# Altium PCB JacdacAccessSwitchInput 34.PcbDoc
Units mm, origin at the board's own origin, x right, y up, seen from the top; angles counter-clockwise.
Board outline 16.5 x 32.9 mm, 2 copper layers (Top Layer, Bottom Layer), stack 1.525 mm thick; 22 components, 19 nets, 81 pads, 17 vias.
Unrouted connection lines stored in the file: 14.
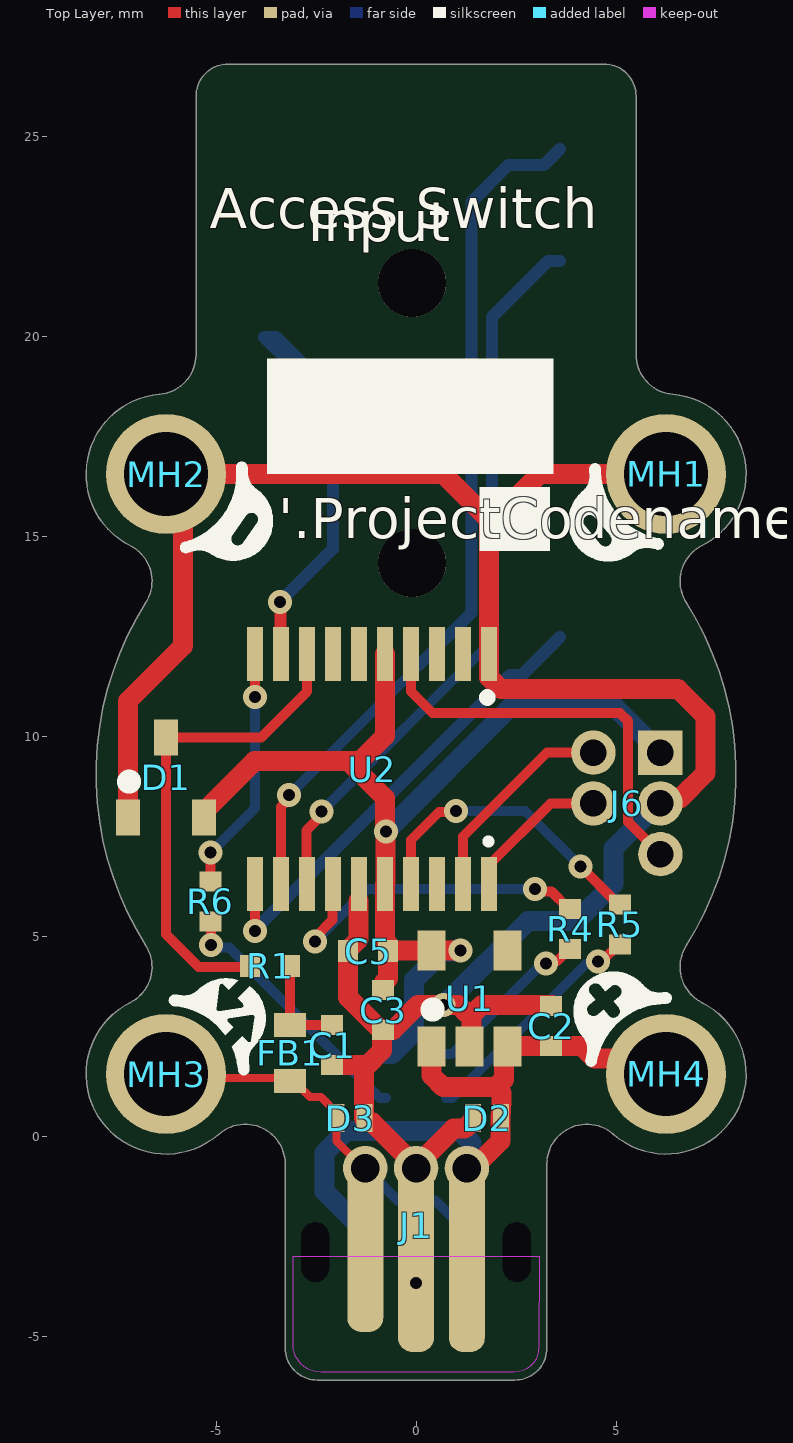
[diagram p0: Top Layer view]
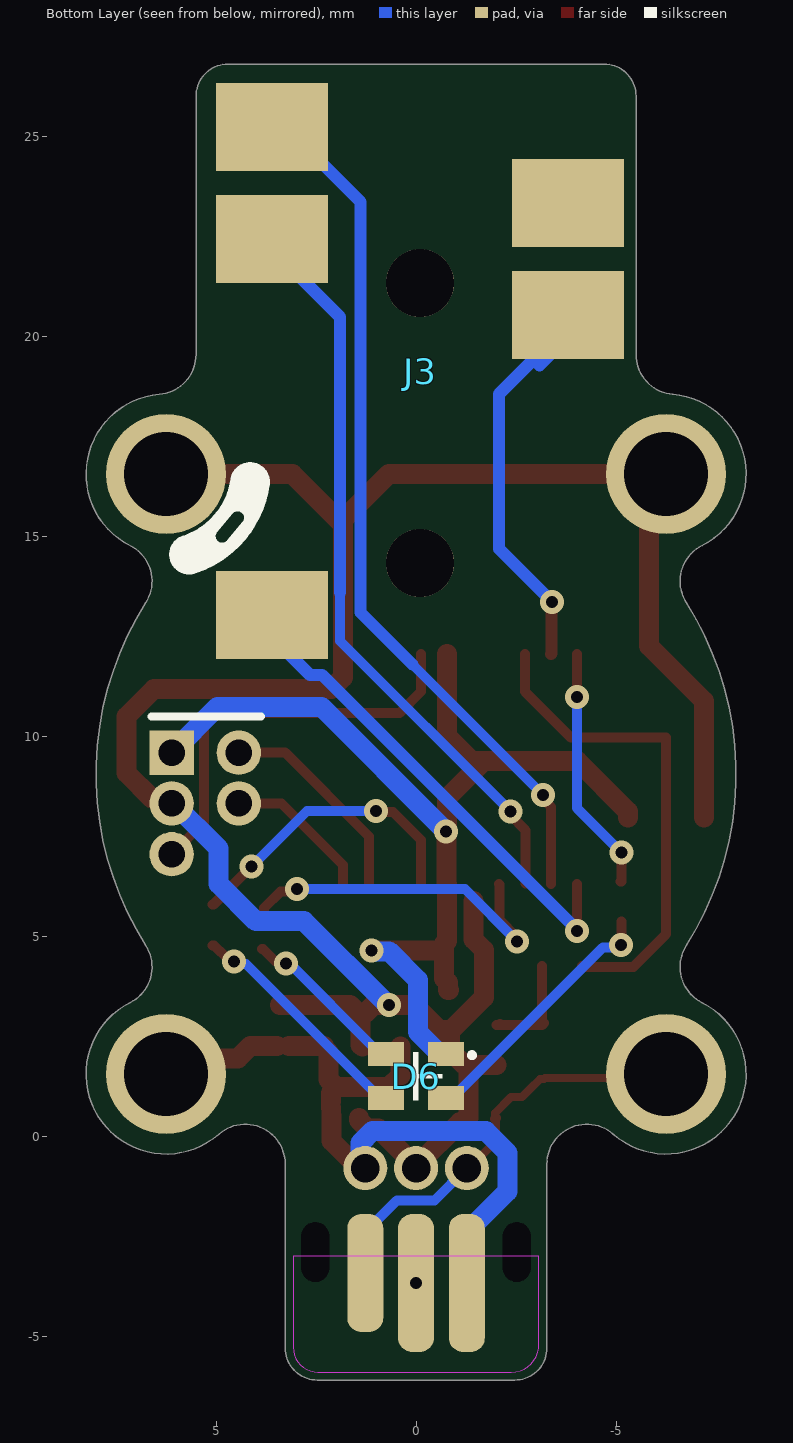
[diagram p1: Bottom Layer view, seen from below]

## Layer stack, top to bottom
Top Solder: solder mask 0.0102, Solder Resist, Dk 3.5
Top Layer: signal copper 0.0356
Dielectric 1: core 1.454, FR-4, Dk 4.2
Bottom Layer: signal copper 0.0356
Bottom Solder: solder mask 0.0102, Solder Resist, Dk 3.5

## Board outline
-7.15,3.336 ccw(c-6.25,1.55) -4.93,0.047 cw(c-4.27,-0.704) -3.27,-0.704 -3.27,-5.3 ccw(c-2.471,-5.301) -2.47,-6.1 2.47,-6.1 ccw(c2.471,-5.301) 3.27,-5.3 3.27,-0.704 cw(c4.27,-0.704) 4.93,0.047 ccw(c6.25,1.55) 7.15,3.336 cw(c7.6,4.229) 6.755,4.765 ccw(c0,9.05) 6.755,13.335 cw(c7.6,13.871) 7.15,14.764 ccw(c6.25,16.55) 6.417,18.543 cw(c6.501,19.539) 5.501,19.539 5.5,19.539 5.5,26 ccw(c4.7,26) 4.7,26.8 -4.7,26.8 ccw(c-4.7,26) -5.5,26 -5.5,19.539 -5.501,19.539 cw(c-6.501,19.539) -6.417,18.543 ccw(c-6.25,16.55) -7.15,14.764 cw(c-7.6,13.871) -6.756,13.335 ccw(c0,9.05) -6.755,4.765 cw(c-7.6,4.229)

## Design rules (kind name [scope] priority, off if disabled: settings)
AssemblyTestPointUsage [All] p1: valid=2
BoardOutlineClearance [All] p1: gap=0.3 ignorepadtopadclearanceinfootprint=FALSE except(0: Arc-SplitContinuation Track-SplitContinuation SMDPad-SplitContinuation THPad-SplitContinuation Via-SplitContinuation Fill-SplitContinuation Poly-SplitContinuation Region-OutlineEdge Region-SplitContinuation Text-SplitContinuation; 0.2: Text-OutlineEdge)
Clearance [All] p1: gap=0.125 ignorepadtopadclearanceinfootprint=FALSE except(0: Arc-Hole Track-Hole SMDPad-Hole THPad-Hole Via-Hole Fill-Hole Poly-Hole Region-Hole Text-Hole)
ComponentClearance [All] p1: gap=0.2 collisioncheckmode=3 verticalgap=0.2 showdistances=FALSE
DiffPairsRouting [All] p1: maxlimit=2 minlimit=0.15 mostfreqgap=0.15 toplayer_minwidth=0.15 toplayer_maxwidth=2 toplayer_prefwidth=0.15 bottomlayer_minwidth=0.15 bottomlayer_maxwidth=2 bottomlayer_prefwidth=0.15 substack1={CB9D278B-8BF5-444A-AAF4-837A2A9DF42D} toplayer_{cb9d278b-8bf5-444a-aaf4-837a2a9df42d}_minwidth=0.381 toplayer_{cb9d278b-8bf5-444a-aaf4-837a2a9df42d}_maxwidth=0.381 toplayer_{cb9d278b-8bf5-444a-aaf4-837a2a9df42d}_prefwidth=0.381 bottomlayer_{cb9d278b-8bf5-444a-aaf4-837a2a9df42d}_minwidth=0.381 bottomlayer_{cb9d278b-8bf5-444a-aaf4-837a2a9df42d}_maxwidth=0.381 bottomlayer_{cb9d278b-8bf5-444a-aaf4-837a2a9df42d}_prefwidth=0.381 substack2={826B8647-A721-4255-895A-19F9591B9CD1} toplayer_{826b8647-a721-4255-895a-19f9591b9cd1}_minwidth=0.381 toplayer_{826b8647-a721-4255-895a-19f9591b9cd1}_maxwidth=0.381 toplayer_{826b8647-a721-4255-895a-19f9591b9cd1}_prefwidth=0.381 bottomlayer_{826b8647-a721-4255-895a-19f9591b9cd1}_minwidth=0.381 bottomlayer_{826b8647-a721-4255-895a-19f9591b9cd1}_maxwidth=0.381 bottomlayer_{826b8647-a721-4255-895a-19f9591b9cd1}_prefwidth=0.381 substack3={E64FCAF4-1BC8-437D-B1E0-0E5F2DC0F59E} toplayer_{e64fcaf4-1bc8-437d-b1e0-0e5f2dc0f59e}_minwidth=0.381 toplayer_{e64fcaf4-1bc8-437d-b1e0-0e5f2dc0f59e}_maxwidth=0.381 toplayer_{e64fcaf4-1bc8-437d-b1e0-0e5f2dc0f59e}_prefwidth=0.381 bottomlayer_{e64fcaf4-1bc8-437d-b1e0-0e5f2dc0f59e}_minwidth=0.381 bottomlayer_{e64fcaf4-1bc8-437d-b1e0-0e5f2dc0f59e}_maxwidth=0.381 bottomlayer_{e64fcaf4-1bc8-437d-b1e0-0e5f2dc0f59e}_prefwidth=0.381 substack4={E61CE66C-507C-4E1E-8E83-C905434AFC1C} toplayer_{e61ce66c-507c-4e1e-8e83-c905434afc1c}_minwidth=0.381 toplayer_{e61ce66c-507c-4e1e-8e83-c905434afc1c}_maxwidth=0.381 toplayer_{e61ce66c-507c-4e1e-8e83-c905434afc1c}_prefwidth=0.381 bottomlayer_{e61ce66c-507c-4e1e-8e83-c905434afc1c}_minwidth=0.381 bottomlayer_{e61ce66c-507c-4e1e-8e83-c905434afc1c}_maxwidth=0.381 bottomlayer_{e61ce66c-507c-4e1e-8e83-c905434afc1c}_prefwidth=0.381 maxuncoupledlength=25
FabricationTestPointUsage [All] p1: valid=2 allowmultiple=FALSE
HoleSize [All] p1: absolutevalues=TRUE maxlimit=2.54 minlimit=0.2 maxpercent=80.000 minpercent=20.000
MinimumSolderMaskSliver [All] p1: minsoldermaskwidth=0.005
PlaneClearance [All] p1: clearance=0.3
PlaneConnect [All] p1: planeconnectstyle=Relief reliefexpansion=0.5 reliefentries=4 reliefconductorwidth=0.2 reliefairgap=0.3
PolygonConnect "PolygonConnect GND" [isVIA] p1: connectstyle=Relief reliefconductorwidth=0.2 reliefentries=4 polygonreliefangle="90 Angle" airgapwidth=0.2
PolygonConnect [All] p2: connectstyle=Relief reliefconductorwidth=0.2 reliefentries=4 polygonreliefangle="90 Angle" airgapwidth=0.2
RoutingVias [All] p1: holewidth=0.3 width=0.6 viastyle="Through Hole" minholewidth=0.3 minwidth=0.6 maxholewidth=0.3 maxwidth=0.8
SilkToSilkClearance [All] p1: silktosilkclearance=0.001
SilkToSolderMaskClearance [IsPad] p1: minsilkscreentomaskgap=0.05 clearancetoexposedcopper=TRUE
SolderMaskExpansion TentVias [IsVia] p1: expansion=0.102 istentingtop=TRUE
SolderMaskExpansion [All] p2: expansion=0.075 istentingtop=FALSE
Width [All] p1: maxlimit=2 minlimit=0.15 preferedwidth=0.15 substack1={CB9D278B-8BF5-444A-AAF4-837A2A9DF42D} substack2={826B8647-A721-4255-895A-19F9591B9CD1} substack3={E64FCAF4-1BC8-437D-B1E0-0E5F2DC0F59E} substack4={E61CE66C-507C-4E1E-8E83-C905434AFC1C} minimp=50.000000 maximp=50.000000 favimp=50.000000
20 further rules are at their usual default settings.

## Components (designator, comment, footprint, x,y, rotation, side; value= is the part's Value field where it differs from the comment)
C1 "CL05C330JB51PNC" "C0402_0.55MM - without outline" -2.1,2.275 r90 top
C2 "CL05A105KP5NNNC" "C0402_0.55MM - without outline" 3.375,2.75 r270 top
C3 "CL05A105KP5NNNC" "C0402_0.55MM - without outline" -0.825,3.15 r90 top
C5 "CL05A105KP5NNNC" "C0402_0.55MM - without outline" -1.2,4.625 r0 top
D1 "BAT54S" "NXP-BAT54S-TO-236AB - without outline" -6.25,8.96 r90 top
D2 "RCLAMP0521P-N" "TVS 0402 - L" 1.777,0.447 r180 top
D3 "RCLAMP0521P-N" "TVS 0402 - L" -1.645,0.447 r0 top
D6 "HSMF-C114" HSMF-C114 0,1.497 r0 bottom
FB1 "TDK MPZ1608S102ATA00" "TDK MPZ1608 0.8MM - WITHOUT OUTLINE" -3.15,2.075 r90 top
J1 "3 pin JACDAC edge connector" JACDAC_EDGE_CONNECTOR_NO_TRACES 0,-0.25 r180 top
J3 "SJ2-43515RS-SMT" SJ-43515RS-SMT-TR -0.1,25.825 r270 bottom
J6 "Hack Connect Mini 1.27 mm pitch 2-row" HACK_CONNECT_MINI_5_X_1_27 6.108,9.586 r180 top
MH1 "MH_5.0MMK_3.0MMC_2.1MMD_PTH" MH_5.0MMK_3.0MMC_2.1MMD_PTH 6.25,16.55 r0 top
MH2 "MH_5.0MMK_3.0MMC_2.1MMD_PTH" MH_5.0MMK_3.0MMC_2.1MMD_PTH -6.25,16.55 r90 top
MH3 "MH_5.0MMK_3.0MMC_2.1MMD_PTH" MH_5.0MMK_3.0MMC_2.1MMD_PTH -6.25,1.55 r0 top
MH4 "MH_5.0MMK_3.0MMC_2.1MMD_PTH" MH_5.0MMK_3.0MMC_2.1MMD_PTH 6.25,1.55 r180 top
R1 "0402WGF2200TCE" "R0402 - Without outline" -3.65,4.25 r0 top
R4 "0402WGF300JTCE" "R0402 - Without outline" 3.85,5.175 r90 top
R5 "0402WGF300JTCE" "R0402 - Without outline" 5.094,5.285 r90 top
R6 "0402WGF1500TCE" "R0402 - Without outline" -5.14,5.87 r90 top
U1 "LDO 3.3V/300 mA" "ON_SEMI-SOT23-5 - without outline" 1.337,3.436 r90 top
U2 "STM32F030F4P6" 20-TSSOP -1.1,9.175 r270 top

## Footprints (in the part's own frame and the unit in brackets; to place one, negate y for a bottom-side part, rotate by r counter-clockwise, add the part's x,y. Pads: shape width x height; smd on the part's side, far side on the other; paste and mask are expansions set on the pad)
20-TSSOP [mm] "0.173\", 4.40mm Width"
  rect 1.35x0.4 smd: 1(-2.875,2.925) 2(-2.875,2.275) 3(-2.875,1.625) 4(-2.875,0.975) 5(-2.875,0.325) 6(-2.875,-0.325) 7(-2.875,-0.975) 8(-2.875,-1.625) 9(-2.875,-2.275) 10(-2.875,-2.925) 11(2.875,-2.925) 12(2.875,-2.275) 13(2.875,-1.625) 14(2.875,-0.975) 15(2.875,-0.325) 16(2.875,0.325) 17(2.875,0.975) 18(2.875,1.625) 19(2.875,2.275) 20(2.875,2.925)
  silkscreen extent -1.87,2.8 -1.7,2.97, body extent -3.3,-3.3 3.3,3.3, height 1.2
"C0402_0.55MM - without outline" [mm]
  rect 0.5x0.55 smd: 1(-0.5,0) 2(0.5,0)
  body extent -0.5,-0.25 0.5,0.25, height 0.55
HACK_CONNECT_MINI_5_X_1_27 [mm]
  rect 1.11x1.11 hole 0.66: 1(0,0)
  round 1.11 hole 0.66: 2(1.676,0) 3(0,1.27) 4(1.676,1.27) 5(0,2.54)
HSMF-C114 [mm] "LED RGB DIFFUSED CHIP SMD"
  rect 0.9x0.6 smd mask+0.05: 1(-0.75,-0.55) 2(-0.75,0.55) 3(0.75,0.55) 4(0.75,-0.55)
  silkscreen extent -1.45,-0.6 0.07,0.6, body extent -0.8,-0.75 0.8,0.75, height 0.55
JACDAC_EDGE_CONNECTOR_NO_TRACES [mm] "JacDac 3 pin connector with no traces"
  rrect78% 0.9x2.95 smd far side paste-1 mask+0: 1(-1.27,3.175)
  rrect78% 0.9x4.3 smd paste-1 mask+0: 1(1.27,2.5)
  round 1.11 / inner round 0.71 / far side round 1.1 hole 0.71 paste-0.254 mask+0: 1(1.27,0.55) 2(0,0.55) 3(-1.27,0.55)
  rrect78% 0.9x3.45 smd far side paste-1 mask+0: 2(0,3.425) 3(1.27,3.425)
  rrect78% 0.9x4.8 smd paste-1 mask+0: 2(0,2.75) 3(-1.27,2.75)
  round 0 hole 0.7 slot 1.5 at 90 deg unplated: ""(-2.52,2.65) ""(2.52,2.65)
  Top Layer keep-out region: -3.075,2.75 -3.07,5.033 -2.987,5.341 -2.761,5.567 -2.453,5.65 -2.453,5.65 2.27,5.65 2.545,5.635 2.794,5.516 2.978,5.31 3.07,5.05 3.07,5.05 3.07,2.75
  Bottom Layer keep-out region: -3.07,2.75 -3.07,5.033 -3.023,5.269 -2.889,5.469 -2.689,5.603 -2.453,5.65 -2.453,5.65 2.27,5.65 2.545,5.635 2.794,5.516 2.978,5.31 3.07,5.05 3.07,5.05 3.07,2.75
MH_5.0MMK_3.0MMC_2.1MMD_PTH [mm] "Mounting Hole 5.0mm clearance, 3.1 annualar ring and 2.1mm PTH"
  round 3 hole 2.1 mask+0.05: 1(0,0)
"NXP-BAT54S-TO-236AB - without outline" [mm] "SOT23, 3-Leads, Body 2.90x2.30mm, Pitch 0.95mm, IPC Medium Density"
  rect 0.9x0.6 smd: 1(-1,0.95) 2(-1,-0.95) 3(1,0)
  silkscreen extent -0.15,0.87 -0.05,0.97, body extent -1.32,-1.5 1.32,1.5, height 1.12
"ON_SEMI-SOT23-5 - without outline" [mm]
  rect 1x0.7 smd: 1(-1.2,0.95) 2(-1.2,0) 3(-1.2,-0.95) 4(1.2,-0.95) 5(1.2,0.95)
  silkscreen extent -0.32,0.87 -0.23,0.97, body extent -1.5,-1.57 1.5,1.58, height 1.1
"R0402 - Without outline" [mm]
  rect 0.5x0.55 smd: 1(-0.5,0) 2(0.5,0)
  body extent -0.5,-0.25 0.5,0.25, height 0.35
SJ-43515RS-SMT-TR [mm] "3.5mm 4 contact SMD socket"
  rect 2.2x2.8 smd: 1(0.6,-3.7) 2(12.8,-3.7) 3(5.3,3.7) 4(3.4,-3.7) 6(2.5,3.7)
  round 1.7 hole 1.7 unplated: ""(4.5,0) ""(11.5,0)
  body extent -1.69,-4.5 15.5,4.5, height 5.1
"TDK MPZ1608 0.8MM - WITHOUT OUTLINE" [mm]
  rect 0.6x0.8 smd: 1(-0.7,0) 2(0.7,0)
  body extent -0.8,-0.4 0.8,0.4, height 0.8
"TVS 0402 - L" [mm] "TVS 0402 RoHS"
  rect 0.4x0.7 smd paste-0.038 mask+0.05: 1(-0.35,0) 2(0.35,0)
  body extent -0.5,-0.3 0.5,0.3, height 0.5

## Part data
C1: "CAP CER 33PF 50V NP0 0402", Capacitance=33pF, Case Code (Imperial)=0402, Case Code (Metric)=1005, Manufacturer=Samsung, Max Operating Temperature=125°C, Min Operating Temperature=-55°C, Ratings=AEC-Q200, Supplier Part Number 1=1276-6515-1-ND, Tolerance=5%, Voltage Rating=50V, Case/Package=0402, Category=Capacitors, Checked=?, ComponentLink1Description="Samsung datasheet online", ComponentLink1URL=http://www.samsungsem.com/kr/support/library/product-catalog/mlcc.jsp, Created=DG, Lead Free="Lead Free", Length=0.039inch, Manufacturer Part Number=CL05C330JB51PNC, Mount="Surface Mount", Packaging="Tape and Reel", Pricing 1="1=0.10000, 10=0.07500, 50=0.04060, 100=0.03320, 500=0.02374, 1000=0.01865, 2500=0.01696, 5000=0.01560 (USD)", Pricing 2="1=0.11000, 10=0.08200, 100=0.03600, 500=0.02600, 1000=0.02000, 2500=0.01800 (USD)", Pricing 3="10000=0.00780 (USD)", RoHS=Yes, Stock 1=250654, Stock 2=97900, Stock 3=100000, Supplier 1=Digi-Key, Supplier 2=Mouser, Supplier 3="Future Electronics", Supplier Part Number 2=187-CL05C330JB51PNC, Supplier Part Number 3=6022520, Thickness=0.022inch, Width=0.02inch
C2 C3 C5: "CAP CER 1UF 10V X5R 0402", Capacitance=1µF, Case Code (Imperial)=0402, Case Code (Metric)=1005, Dielectric=X5R, Manufacturer=Samsung, Max Operating Temperature=85°C, Min Operating Temperature=-55°C, Package Quantity=1, Supplier Part Number 1=1276-1076-1-ND, Tolerance=10%, Voltage Rating=10V, Case/Package=0402, Category=Capacitors, Checked=?, ComponentLink1Description="Online datasheet", ComponentLink1URL=https://datasheet.ciiva.com/15195/getdatasheetpartid-358390-15195630.pdf, Contact Plating=Tin, Created=DG, Depth=0.5mm, Height=0.5mm, Length=1mm, Manufacturer Part Number=CL05A105KP5NNNC, Material=Ceramic, Mount="Surface Mount", Packaging="Tape and Reel", Pricing 1="1=0.10000, 10=0.03900, 50=0.02100, 100=0.01720, 500=0.01228, 1000=0.00965, 2500=0.00877, 5000=0.00807 (USD)", Pricing 2="1=0.10000, 10=0.04200, 100=0.01800, 500=0.01300, 1000=0.01000, 2500=0.00900 (USD)", Pricing 3="10=0.02450, 100=0.02000, 500=0.01310, 2500=0.00920, 5000=0.00810, 10000=0.00640, 50000=0.00490 (GBP)", Radiation Hardening=No, RoHS=Yes, Stock 1=5705569, Stock 2=928941, Stock 3=53670, Supplier 1=Digi-Key, Supplier 2=Mouser, Supplier 3=Farnell, Supplier Part Number 2=187-CL05A105KP5NNNC, Supplier Part Number 3=3013329, Thickness=0.022inch, Width=0.02inch
D1: "DIODE ARRAY SCHOTTKY 30V SOT23", Manufacturer=Nexperia, Manufacturer Part Number=BAT54S,235, Supplier Part Number 1=1727-1868-1-ND, Category="Rectifier Diodes", ComponentLink1Description="NXP datasheet online", ComponentLink1URL=https://assets.nexperia.com/documents/data-sheet/BAT54_SER.pdf, Pricing 1="1=0.13000, 10=0.11900, 100=0.05610, 500=0.03326, 1000=0.02185, 5000=0.02138 (USD)", RoHS=No, Stock 1=14011, Supplier 1=Digi-Key, Supplier 2=Mouser, Supplier 3=RSComponents, Supplier Part Number 2=771-BAT54S235, Supplier Part Number 3=1707990
D2 D3: "Bidirectional 5V (Max) 6V 16V 3.5A (8/20us) 0402 TVS RoHS", Manufacturer="Born Semiconductor", Package=0402, Supplier1 Part Number=C316043, Checked By=?, ComponentLink1Description="Online datasheet", ComponentLink1URL=https://datasheet.lcsc.com/szlcsc/Bourne-Semicon-Shenzhen-RCLAMP0521P-N_C316043.pdf, Created By="D Gakure", Manufacturer Part Number=RCLAMP0521P-N, Supplier1=LCSC
D6: "Red, Green, Blue (RGB) 626nm Red, 525nm Green, 470nm Blue LED Indication - Discrete 1.9V Red, 3.4V Green, 3.4V Blue 0606 (1616 Metric)", Case Code (Imperial)=0606, Case Code (Metric)=1616, Color=Blue,Green,Red, Forward Current=20mA, Forward Voltage=3.4V, Lens Color=White, Manufacturer="Broadcom Avago", Max Operating Temperature=85°C, Min Operating Temperature=-40°C, Package Quantity=4000, Power Rating=78mW, Reverse Voltage=5V, Supplier Part Number 1=516-1795-1-ND, Case/Package=0606, Category=Optoelectronics, Checked By=?, ComponentLink1Description="Online datasheet", ComponentLink1URL=https://docs.broadcom.com/docs/AV02-2451EN, Created By="D. Gakure", Depth=1.6mm, Dominant Wavelength=470nm, Height=0.35mm, Lead Free="Lead Free", Length=1.6mm, Lens Style=Diffused,Rectangular, Lens Transparency=Diffused, Luminous Intensity=70mcd, Manufacturer Part Number=HSMF-C114, Mount="Surface Mount", Number of Elements=3, Number of LEDs=3, Number of Pins=4, Packaging="Tape and Reel", Pricing 1="1=1.78000, 10=1.12500, 100=0.83250, 500=0.76500, 1000=0.63000, 2000=0.59850 (USD)", Pricing 2="1=1.56000, 10=0.97100, 25=0.87800, 50=0.78500, 100=0.69200, 500=0.60500 (GBP)", Pricing 3="1=1.69000, 10=1.13000, 50=1.13000, 100=0.85600, 1000=0.74800, 10000=0.74800 (USD)", Radiation Hardening=No, REACH SVHC="No SVHC", RoHS=Yes, Stock 1=20555, Stock 2=8134, Stock 3=14991, Supplier 1=Digi-Key, Supplier 2=Farnell, Supplier 3=Mouser, Supplier Part Number 2=1058362, Supplier Part Number 3=630-HSMF-C114, Test Current=20mA, Viewing Angle=145°, Wavelength=470nm, Width=1.5mm
FB1: "0603 1k@100MHz 0.8A chip", Case Code (Imperial)=0603, Case Code (Metric)=1608, Current Rating=800mA, DC Resistance (DCR)=300mR, Manufacturer=TDK, Manufacturer Part Number=MPZ1608S102ATA00, Package Quantity=4000, Supplier Part Number 1=445-8694-1-ND, Tolerance=25%, Case/Package=0603, ComponentLink2Description="datasheet online", ComponentLink2URL=https://www.mouser.co.uk/datasheet/2/400/eads_commercial_power_mpz1608_en-923650.pdf, ComponentLink3Description=datasheet, ComponentLink3URL="Y:\System\Altium\Libraries 2014\TDK\Datasheets\eads_commercial_power_mpz1608_en-923650.pdf", Core Material=Ferrite, Height=0.037inch, Impedance="1kR @ 100MHz", Length=0.063inch, Max DC Current=800mA, Mount="Surface Mount", Packaging="Tape and Reel", Pricing 1="1=0.1, 10=0.079, 25=0.0716, 50=0.0644, 100=0.0472, 250=0.03432, 500=0.03146, 1000=0.02717 (USD)", Stock 1=113542, Supplier 1=Digi-Key, Supplier 2=Mouser, Supplier Part Number 2=810-MPZ1608S102ATA00, Width=0.031inch
J1: library part "Jacdac edge connector", "3 pin Jacdac edge connector 1.27mm pitch", Manufacturer Part Number=JACDAC_EDGE_CONNECTOR, Checked By=?, ComponentLink1Description="Yuliang JACDAC cable connector drawing online", ComponentLink1URL=https://github.com/microsoft/jacdac-mdk/blob/main/connector/JACDAC-Connector-by-Yuliang-2020-11-28.pdf, ComponentLink2Description="JACDAC PCB edge connector spec onlin", ComponentLink2URL=https://github.com/microsoft/jacdac-mdk/blob/main/connector/JACDAC_PCB_Edge_Connector_Drawing_JD-PEC-01_rev_01.pdf, Created By="D. Gakure", PCB Type="1.6mm FR4"
J3: "4-way 3.5mm jack socket SMD R/A TRRS", Color=Black, Manufacturer=CUI, Manufacturer Part Number=SJ-43515RS-SMT-TR, Supplier Part Number 1=CP-43515RSSJCT-ND, ComponentLink1Description="CUI datasheet", ComponentLink1URL=https://www.cuidevices.com/product/resource/sj-4351x-smt.pdf, Connector Type=Jack, Number of Conductors=5, Number of Ports=1, Orientation=Horizontal, Pricing 1="1=1.15, 10=1.013, 25=0.9532, 50=0.9134, 100=0.8736, 250=0.7942, 500=0.71478 (USD)", Shielding=Unshielded, Stock 1=2113, Supplier 1=Digi-Key
J6: library part HACK_CONNECT_MINI
MH1 MH2 MH3 MH4: "Mounting Hole 5.0mm keepout, 3.0mm annualar ring and 2.1mm Drill PTH"
R1: "RES SMD 220 OHM 1% 1/16W 0402", Case Code (Imperial)=0402, Manufacturer="Uniroyal Elec", Resistance=220R, Tolerance=1%, ComponentLink1Description="datasheet (offline)", ComponentLink1URL="Y:\System\Altium\Libraries 2014\Uniroyal Elec\Datasheets\Uniro", Manufacturer Part Number=0402WGF2200TCE
R4 R5: "RES SMD 30 OHM 1% 1/16W 0402", Case Code (Imperial)=0402, Manufacturer="Uniroyal Elec", Resistance=30R, Tolerance=1%, ComponentLink1Description="datasheet (offline)", ComponentLink1URL="Y:\System\Altium\Libraries 2014\Uniroyal Elec\Datasheets\Uniro", Manufacturer Part Number=0402WGF300JTCE
R6: "RES SMD 150 OHM 1% 1/16W 0402", Case Code (Imperial)=0402, Manufacturer="Uniroyal Elec", Resistance=150R, Tolerance=1%, ComponentLink1Description="datasheet (offline)", ComponentLink1URL="Y:\System\Altium\Libraries 2014\Uniroyal Elec\Datasheets\Uniro", Manufacturer Part Number=0402WGF1500TCE
U1: library part NCP114ASN330T1G, "ON SEMICONDUCTOR - NCP114ASN330T1G - LDO Voltage Regulator, Fixed, 1.7 V to 5.5 V in, 3.3 V/300 mA out, 150 mV drop, TSOP-5", Case/Package=SOT-23-5, Dropout Voltage=225mV, Manufacturer="ON Semiconductor", Max Input Voltage=5.5V, Max Operating Temperature=85°C, Min Operating Temperature=-40°C, Min Output Voltage=3.3V, Output Current=300mA, Power Supply Rejection Ratio (PSRR)=75dB, Quiescent Current=95uA, Supplier Part Number 1=NCP114ASN330T1GOSCT-ND, Category="Voltage Regulators - Linear", Checked=?, ComponentLink3Description="On Semi datasheet online", ComponentLink3URL=http://www.onsemi.com/pub/Collateral/NCP114-D.PDF, Created=DG, Lead Free="Lead Free", Manufacturer Part Number=NCP114ASN330T1G, Mount="Surface Mount", Number of Regulators=1, Output Configuration=Positive, Output Type=Fixed, Packaging="Cut Tape", Pricing 1="1=0.33000, 10=0.24900, 25=0.21760, 100=0.12440, 250=0.11664, 500=0.09330, 1000=0.07153 (USD)", RoHS=No, Stock 1=32529, Supplier 1=Digi-Key, Supplier 2=RSComponents, Supplier 3=Mouser, Supplier Part Number 2=1263178, Supplier Part Number 3=863-NCP114ASN330T1G
U2: library part "ST STM32F030F4P6", "STMICROELECTRONICS - STM32F030F4P6 - 32 Bit Microcontroller, Value Line, ARM Cortex-M0, 48 MHz, 16 KB, 4 KB, 20, TSSOP RoHS Compliant: Yes", Case/Package=TSSOP, Frequency=48MHz, Manufacturer=STMicroelectronics, Max Operating Temperature=85°C, Max Power Dissipation=182mW, Max Supply Voltage=3.6V, Min Operating Temperature=-40°C, Min Supply Voltage=2.4V, Package Quantity=74, Supplier Part Number 1=2393635, Categories="Integrated Circuits", Category=Microcontrollers, Checked=?, ComponentLink1Description="Online datasheet", ComponentLink1URL=https://datasheet.ciiva.com/29720/dm00088500-29720640.pdf, Contact Plating=Gold, Core Architecture=ARM, Created=DG, Data Bus Width=32b, Height=1.05mm, Interface=I2C,SPI,UART,USART, Lead Free="Lead Free", Length=6.6mm, Manufacturer Part Number=STM32F030F4P6, Max Frequency=48MHz, Memory Size=16KB, Memory Type=FLASH, Number of ADC Channels=16, Number of I2C Channels=1, Number of I/Os=15, Number of Pins=20, Number of Programmable I/O=15, Number of PWM Channels=6, Number of SPI Channels=1, Number of Timers/Counters=5, Oscillator Type=Internal, Packaging=Rail/Tube, Peripherals=POR,PWM,WDT,DMA, Pricing 1="1=0.97500, 25=0.85400, 50=0.75500, 100=0.65600, 250=0.61800, 500=0.58000, 1000=0.52500, 2500=0.46900 (GBP)", Pricing 3="100=0.43900, 250=0.38800, 1000=0.37300 (GBP)", Radiation Hardening=No, RAM Size=4KB, REACH SVHC="No SVHC", RoHS=Yes, Stock 1=1196, Stock 3=48, Supplier 1=Farnell, Supplier 2=Digi-Key, Supplier 3=RSComponents, Supplier Part Number 2=497-14044-5-ND, Supplier Part Number 3=7925925P, Watchdog Timer=Yes, Width=4.5mm

## Via types
v1: diameter 0.6, hole 0.3, Top Layer to Bottom Layer, tented both sides, 17 vias

## Nets (pads, with @x,y where several pads share a name; then routed paths per layer and width w, separated by ;. In a path a pad name is that pad's centre, name@x,y a point inside that pad or via, vN(x,y) a via of type N, cw(c..) or ccw(c..) an arc to the next point about the centre after c; other vN are vias at no path point)
3V3: C3.2 C5.2 D1.2 D6.1 J6.1 U1.5 U2.5 U2.16 | length 27.8
  Top Layer w0.5: D1.2 -5.3,8.11 -4.035,9.375 -1.7,9.375 ; C3.2 -0.8,3.65 -0.8,3.84 -0.697,3.943 -0.697,4.451 -0.7,4.454 C5.2@-0.7,4.622 ; v1@-0.775,7.644 -0.775,8.45 -1.7,9.375 ; U2.5 -0.775,10 -1.4,9.375 -1.7,9.375 ; v1(-0.748,7.617) -0.762,7.604 -0.762,6.313 U2.16 -0.775,4.871 -0.7,4.796 C5.2@-0.7,4.636 ; C5.2 C5.2@-0.7,4.636 ; v1(1.11,4.637) 0.388,4.637 C5.2@-0.7,4.636
  Bottom Layer w0.5: D6.1 -0.6,2.047 -0.55,2.097 -0.05,2.597 -0.05,3.897 0.671,4.618 1.091,4.618 v1(1.11,4.637) ; v1@-0.729,7.636 2.36,10.725 4.97,10.725 J6.1
GND: C1.1 C2.1 C3.1 C5.1 D1.1 D2.2 D3.2 J1.2 J6.3 MH1.1 MH2.1 U1.2 U2.1 U2.15 | length 59.5
  Top Layer w0.3: J1.2@-0.153,-0.647 J1.2@0,-0.8
  Top Layer w0.5: D1.1 -7.2,10.875 -5.825,12.25 -5.825,16.125 MH2.1 0.68,16.55 1.825,15.405 1.825,15.282 ; C1.1@-2.006,1.772 -1.216,1.772 -0.85,2.138 C3.1@-0.85,2.65 ; U2.15@-1.438,5.875 -1.438,4.912 -1.7,4.65 -1.7,3.47 -0.88,2.65 C3.1@-0.85,2.65 ; -1.306,1.547 -1.306,0.457 D3.2 ; D3.2@-1.245,0.347 -1.101,0.347 J1.2@0,-0.755 ; J1.2@0,-0.8 J1.2@0,-0.755 ; 1.28,3.059 1.06,3.279 v1(0.68,3.279) 0.051,3.279 -0.579,2.65 C3.1@-0.85,2.65 ; U1.2 1.383,2.282 1.383,3.013 ; 1.383,3.083 1.383,3.013 ; D2.2 1.427,0.397 1.214,0.184 0.938,0.184 J1.2@0,-0.755 ; C2.1@3.4,3.275 1.646,3.275 1.383,3.013 ; J6.3 6.225,8.433 6.596,8.433 7.238,9.075 7.238,10.488 6.549,11.176 2.118,11.176 1.825,11.469 1.825,15.282 ; MH1.1 3.093,16.55 1.825,15.282
  Bottom Layer w0.5: v1@0.707,3.279 2.801,5.373 4.005,5.373 4.935,6.303 4.935,7.188 6.063,8.316 J6.3
  other v1: 0,-3.675
JACK_R1: J3.3 U2.9 | length 10.4
  Top Layer w0.3: v1(-3.4,13.357) -3.388,13.344 -3.388,12.063 U2.9
  Bottom Layer w0.3: v1(-3.4,13.357) -2.075,14.682 -2.075,18.55 -3.5,19.975 -3.8,19.975 -3.091,19.266
JACK_R2: J3.4 U2.13 | length 18.4
  Top Layer w0.25: U2.13@-2.737,6.312 -2.737,7.644 -2.358,8.023 v1(-2.358,8.118)
  Bottom Layer w0.25: v1(-2.358,8.118) 1.9,12.376 1.9,13.583
  Bottom Layer w0.3: 1.9,13.583 1.9,20.475 3.3,21.875 J3.4@3.6,21.875
JACK_SLEEVE: J3.1 U2.12 | length 21.8
  Top Layer w0.25: U2.12 -3.375,8.231 -3.172,8.434 v1(-3.172,8.529)
  Bottom Layer w0.25: v1(-3.172,8.529) 0.091,11.792
  Bottom Layer w0.3: 0.091,11.792 1.385,13.086 1.385,23.351 2.308,24.275 3.2,24.275 J3.1@3.6,24.675
JACK_TIP: J3.2 U2.11 | length 11.9
  Top Layer w0.25: v1(-4.025,5.121) U2.11
  Bottom Layer w0.3: v1(-4.025,5.121) -4.025,5.153 2.347,11.525 2.65,11.525 J3.2@3.6,12.475
JD_DATA: D3.1 FB1.1 J1.1 MH3.1 | length 10.7
  Top Layer w0.2: MH3.1 -6.149,1.449 -3.225,1.449 -3.196,1.42 -3.095,1.42 -2.85,1.175 -2.651,0.976 -2.374,0.976 -1.97,0.572 D3.1@-1.97,0.422 ; D3.1 -1.995,-0.127 -1.322,-0.8 J1.1@-1.27,-0.8
  Top Layer w0.25: D3.1 D3.1@-1.97,0.422
  Bottom Layer w0.25: J1.1@-1.27,-0.8 -0.459,-1.611 0.481,-1.611 1.27,-2.4 J1.1@1.27,-3.425
JD_DATA_MCU: D1.3 R1.1 U2.8 | length 12.3
  Top Layer w0.25: R1.1 -4.168,4.232 -5.436,4.232 -6.25,5.046 D1.3 -3.874,9.96 -2.725,11.109 U2.8
JD_PWR: C2.2 D2.1 J1.3 MH4.1 U1.1 U1.3 | length 18.4
  Top Layer w0.5: U1.1 0.387,1.513 0.68,1.22 1.994,1.22 ; J1.3@1.27,-0.8 1.435,-0.8 2.114,-0.121 D2.1@2.114,0.433 ; D2.1@2.114,0.461 2.133,0.864 2.133,1.082 1.994,1.22 ; U1.3@2.305,2.253 C2.2@3.179,2.253 ; U1.3@2.311,2.213 2.193,2.095 2.193,1.419 1.994,1.22 ; C2.2@3.475,2.25 4.143,2.25 4.455,1.937 5.863,1.937 MH4.1
  Bottom Layer w0.5: J1.3@-1.27,-3.675 -1.27,-2.4 -2.287,-1.383 -2.287,-0.419 -1.743,0.125 1.092,0.125 1.385,-0.168 1.385,-0.685 J1.3@1.27,-0.8
JD_RGB_B: R4.2 U2.14 | length 9
  Top Layer w0.15: R4.2@3.763,5.762 R4.2
  Top Layer w0.25: v1(-2.527,4.87) -2.527,4.965 -2.086,5.406 -2.086,6.289 U2.14 ; v1(2.976,6.175) 3.043,6.108 3.392,6.108 3.8,5.7 R4.2@3.8,5.564
  Bottom Layer w0.15: v1(-2.527,4.87) v1@-2.483,4.827
  Bottom Layer w0.25: v1(-2.527,4.87) -1.222,6.175 v1(2.976,6.175)
JD_RGB_G: R5.2 U2.17 | length 7.6
  Top Layer w0.25: U2.17 -0.125,7.402 0.573,8.101 0.97,8.101 v1(0.999,8.13) ; v1(4.117,6.737) 5.069,5.785 R5.2
  Bottom Layer w0.25: v1(0.999,8.13) 2.724,8.13 v1(4.117,6.737)
JD_RGB_R: R6.2 U2.10 | length 6.2
  Top Layer w0.25: v1(-5.138,7.085) v1(-5.138,7.085) -5.139,6.371 R6.2 R6.2@-5.115,6.37 ; v1(-4.025,10.982) U2.10
  Bottom Layer w0.25: v1(-5.138,7.085) -4.025,8.198 v1(-4.025,10.982)
NetC1_2: C1.2 FB1.2 R1.2 | length 2.7
  Top Layer w0.25: R1.2 -3.15,2.866 -3.196,2.82 -3.147,2.772 C1.2@-2.006,2.772 ; C1.2@-2.13,2.775 C1.2@-2.1,2.805
NetD6_2: D6.2 R6.1 | length 6.6
  Top Layer w0.25: R6.1 -5.131,5.361 -5.131,4.791 v1(-5.121,4.782)
  Bottom Layer w0.25: v1(-5.121,4.782) -5.054,4.715 -4.668,4.715 -0.9,0.947 D6.2
NetD6_3: D6.3 R5.1 | length 5.9
  Top Layer w0.25: v1(4.546,4.368) 4.641,4.368 4.889,4.616 4.9,4.616 5.05,4.766 R5.1@5.094,4.766
  Bottom Layer w0.25: D6.3 0.9,0.947 1.075,1.122 1.075,1.126 4.25,4.301 4.479,4.301 v1(4.546,4.368)
NetD6_4: D6.4 R4.1 | length 4.2
  Top Layer w0.25: v1(3.251,4.312) 3.318,4.379 3.529,4.379 3.825,4.675 R4.1
  Bottom Layer w0.25: D6.4 0.9,2.047 1.075,2.222 1.075,2.229 3.157,4.312 v1(3.251,4.312)
nRESET: J6.5 U2.4 | length 10.3
  Top Layer w0.25: U2.4 -0.125,11.115 0.41,10.58 5.094,10.58 5.303,10.371 5.303,7.851 J6.5
SWCLK: J6.4 U2.20 | length 3.7
  Top Layer w0.25: U2.20 1.825,6.775 3.366,8.316 J6.4
SWDIO: J6.2 U2.19 | length 5.3
  Top Layer w0.25: U2.19 1.175,7.489 3.272,9.586 J6.2
pads on no net: J1. J3. J3.6 U1.4 U2.2 U2.3 U2.6 U2.7 U2.18

## Silkscreen, mask and mechanical layers (free items; w line width, h text height)
Top Overlay:
  drawing of 7 lines, arcs and shapes, not listed
  text "Access Switch" at -5.155,22.699 h1
  text "Input" at -2.712,22.372 h1
  text "'.ProjectCodenameID'-'.ProjectRevision'" at -3.45,14.95 h1
Bottom Overlay:
  region: 187 vertices and 1 holes, not listed, extent 3.655,14.044 6.167,16.842
Dimension:
  lines w0.05: -5.501,19.539 cw(c-6.501,19.539) -6.417,18.543 ccw(c-6.25,16.55) -7.15,14.764 cw(c-7.6,13.871) -6.756,13.335 ccw(c0,9.05) -6.755,4.765 cw(c-7.6,4.229) -7.15,3.336 ccw(c-6.25,1.55) -4.93,0.047 cw(c-4.27,-0.704) -3.27,-0.704 -3.27,-5.3 ccw(c-2.471,-5.301) -2.47,-6.1 2.47,-6.1 ccw(c2.471,-5.301) 3.27,-5.3 3.27,-0.704 cw(c4.27,-0.704) 4.93,0.047 ccw(c6.25,1.55) 7.15,3.336 cw(c7.6,4.229) 6.755,4.765 ccw(c0,9.05) 6.755,13.335 cw(c7.6,13.871) 7.15,14.764 ccw(c6.25,16.55) 6.417,18.543 cw(c6.501,19.539) 5.501,19.539 ; -5.5,19.539 -5.5,26 cw(c-4.7,26) -4.7,26.8 4.7,26.8 cw(c4.7,26) 5.5,26 5.5,19.539
Board Outline:
  lines w0.2: -5.501,19.539 cw(c-6.501,19.539) -6.417,18.543 ccw(c-6.25,16.55) -7.15,14.764 cw(c-7.6,13.871) -6.756,13.335 ccw(c0,9.05) -6.755,4.765 cw(c-7.6,4.229) -7.15,3.336 ccw(c-6.25,1.55) -4.93,0.047 cw(c-4.27,-0.704) -3.27,-0.704 -3.27,-5.3 ccw(c-2.471,-5.301) -2.47,-6.1 2.47,-6.1 ccw(c2.471,-5.301) 3.27,-5.3 3.27,-0.704 cw(c4.27,-0.704) 4.93,0.047 ccw(c6.25,1.55) 7.15,3.336 cw(c7.6,4.229) 6.755,4.765 ccw(c0,9.05) 6.755,13.335 cw(c7.6,13.871) 7.15,14.764 ccw(c6.25,16.55) 6.417,18.543 cw(c6.501,19.539) 5.501,19.539 ; -5.5,19.539 -5.5,26 cw(c-4.7,26) -4.7,26.8 4.7,26.8 cw(c4.7,26) 5.5,26 5.5,19.539
Top Assy:
  lines w0.05: -5.501,19.539 cw(c-6.501,19.539) -6.417,18.543 ccw(c-6.25,16.55) -7.15,14.764 cw(c-7.6,13.871) -6.756,13.335 ccw(c0,9.05) -6.755,4.765 cw(c-7.6,4.229) -7.15,3.336 ccw(c-6.25,1.55) -4.93,0.047 cw(c-4.27,-0.704) -3.27,-0.704 -3.27,-5.3 ccw(c-2.471,-5.301) -2.47,-6.1 2.47,-6.1 ccw(c2.471,-5.301) 3.27,-5.3 3.27,-0.704 cw(c4.27,-0.704) 4.93,0.047 ccw(c6.25,1.55) 7.15,3.336 cw(c7.6,4.229) 6.755,4.765 ccw(c0,9.05) 6.755,13.335 cw(c7.6,13.871) 7.15,14.764 ccw(c6.25,16.55) 6.417,18.543 cw(c6.501,19.539) 5.501,19.539 ; -5.5,19.539 -5.5,26 cw(c-4.7,26) -4.7,26.8 4.7,26.8 cw(c4.7,26) 5.5,26 5.5,19.539
Bottom Assy:
  lines w0.05: -5.501,19.539 cw(c-6.501,19.539) -6.417,18.543 ccw(c-6.25,16.55) -7.15,14.764 cw(c-7.6,13.871) -6.756,13.335 ccw(c0,9.05) -6.755,4.765 cw(c-7.6,4.229) -7.15,3.336 ccw(c-6.25,1.55) -4.93,0.047 cw(c-4.27,-0.704) -3.27,-0.704 -3.27,-5.3 ccw(c-2.471,-5.301) -2.47,-6.1 2.47,-6.1 ccw(c2.471,-5.301) 3.27,-5.3 3.27,-0.704 cw(c4.27,-0.704) 4.93,0.047 ccw(c6.25,1.55) 7.15,3.336 cw(c7.6,4.229) 6.755,4.765 ccw(c0,9.05) 6.755,13.335 cw(c7.6,13.871) 7.15,14.764 ccw(c6.25,16.55) 6.417,18.543 cw(c6.501,19.539) 5.501,19.539 ; -5.5,19.539 -5.5,26 cw(c-4.7,26) -4.7,26.8 4.7,26.8 cw(c4.7,26) 5.5,26 5.5,19.539

## Dimensions
-4.7,26.8 to -2.47,-6.1 on Dimension
-8,9.05 to 8,9.05 on Dimension
-3.27,-5.3 to 3.27,-5.3 on Dimension

## Text inside footprints (layer, text, board x,y; h text height)
J1: Mechanical 9 "Jacdac / cable connector  / body" at 4.821,-10.258 h1.7 r180; Alignment "board outline  / for 'innie'" at -4.53,1.731 h1.2 r180; Alignment "board outline  / for 'outie'" at -5.14,-1.114 h1.2 r180
J3: Alignment "Board edge" at 8.3,27.358 h1
MH1: Assembly Notes "board outline can  / be on 2.0mm   / radius if necessary" at 9.044,12.994 h0.5; Assembly Notes "5mm dia keepout  / for traces and  / components to  / allow space for  / bushes/standoffs/ / nuts/screw heads" at 9.044,17.439 h0.5
MH2: Assembly Notes "5mm dia keepout  / for traces and  / components to  / allow space for  / bushes/standoffs/ / nuts/screw heads" at -7.139,19.344 h0.5 r90; Assembly Notes "board outline can  / be on 2.0mm   / radius if necessary" at -2.694,19.344 h0.5 r90
MH3: Assembly Notes "5mm dia keepout  / for traces and  / components to  / allow space for  / bushes/standoffs/ / nuts/screw heads" at -3.456,2.439 h0.5; Assembly Notes "board outline can  / be on 2.0mm   / radius if necessary" at -3.456,-2.006 h0.5
MH4: Assembly Notes "5mm dia keepout  / for traces and  / components to  / allow space for  / bushes/standoffs/ / nuts/screw heads" at 3.456,0.661 h0.5 r180; Assembly Notes "board outline can  / be on 2.0mm   / radius if necessary" at 3.456,5.106 h0.5 r180